# Altium PCB 19v_converter_pcb.PcbDoc
Units mil, origin at the board's own origin, x right, y up, seen from the top; angles counter-clockwise.
Board outline 6000 x 4000 mil, 2 copper layers (Top Layer, Bottom Layer); 35 components, 25 nets, 102 pads, 0 vias.
Unrouted connection lines stored in the file: 55.
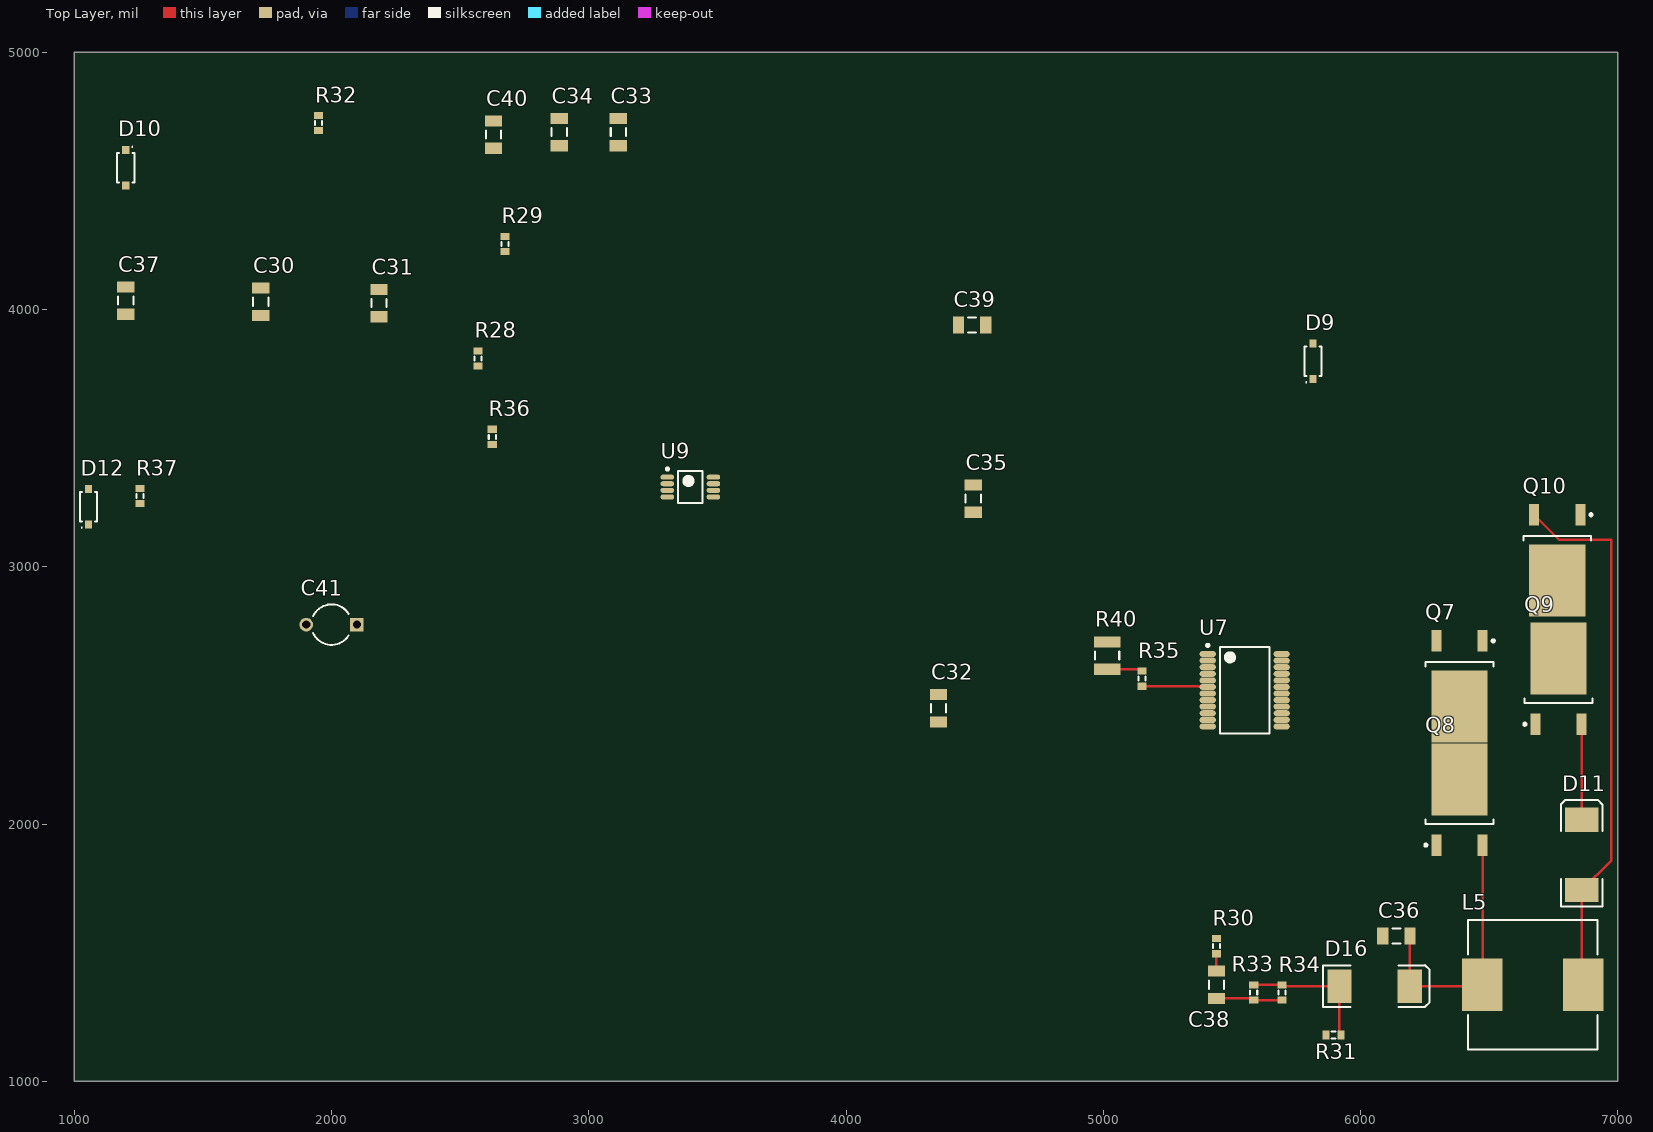
[diagram p0: Top Layer view]
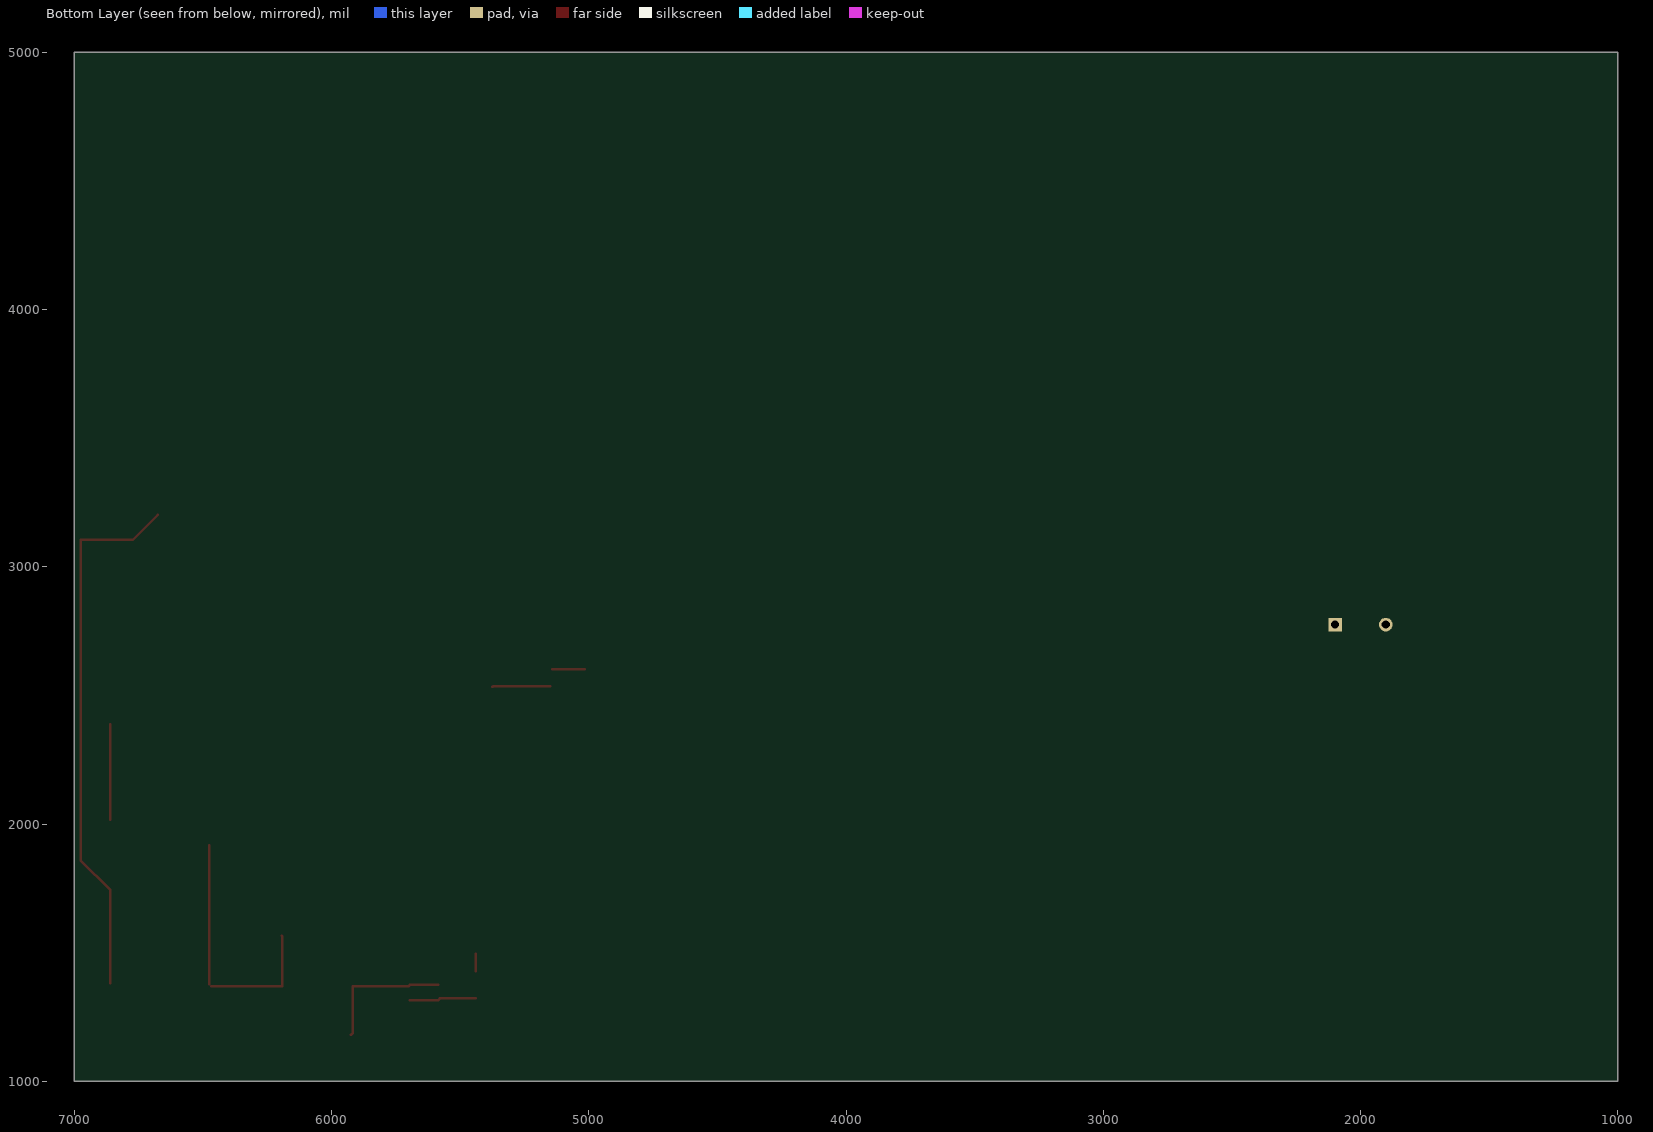
[diagram p1: Bottom Layer view, seen from below]

## Layer stack, top to bottom
Top Solder: solder mask 0.4, Solder Resist, Dk 3.5
Top Layer: signal copper 1.4
Dielectric 1: dielectric 12.6, FR-4, Dk 4.8
Bottom Layer: signal copper 1.4
Bottom Solder: solder mask 0.4, Solder Resist, Dk 3.5

## Board outline
1000,1000 7000,1000 7000,5000 1000,5000

## Design rules (kind name [scope] priority, off if disabled: settings)
Clearance [All] p1: gap=10
PolygonConnect [All] p1: connectstyle=Relief reliefconductorwidth=10 reliefentries=4 polygonreliefangle="90 Angle" airgapwidth=10
RoutingVias [All] p1: holewidth=28 width=50 viastyle="Through Hole" minholewidth=28 minwidth=50 maxholewidth=28 maxwidth=50
SolderMaskExpansion [All] p1: expansion=4
Width [All] p1: maxlimit=10 minlimit=10 preferedwidth=10
30 further rules are at their usual default settings.

## Components (designator, comment, footprint, x,y, rotation, side; value= is the part's Value field where it differs from the comment)
C30 "Cap Semi" C1206 1725,4030 r90 top
C31 "Cap Semi" C1206 2185,4025 r90 top
C32 "Cap Semi" C1206 4360,2450 r270 top
C33 "Cap Semi" C1206 3115,4690 r90 top
C34 "Cap Semi" C1206 2885,4690 r90 top
C35 "Cap Semi" C1206 4495,3265 r90 top
C36 "Cap Semi" C1206 6140,1565 r180 top
C37 "Cap Semi" C1206 1200,4035 r90 top
C38 "Cap Semi" C1206 5440,1375 r90 top
C39 "Cap Semi" C1206 4490,3940 r180 top
C40 "Cap Semi" C1206 2630,4680 r270 top
C41 "390u" CAPR5-4X5 2000,2775 r180 top
D9 "1N5819" SODFL370X175-2N 5815,4005 r90 top
D10 "1N5819" SODFL370X175-2N 1200,4345 r270 top
D11 "MBRS340" SMC 6860,1880 r90 top
D12 "MMSZ5230B" SODFL370X175-2N 1055,3440 r90 top
D16 "MBRS340" SMC 6055,1370 r0 top
L5 "SRR1240-4R7MCT" INDP125125X40N 6670,1375 r0 top
Q7 "BUK6212-40C" DPAK228P1000X238-3N 6385,2535 r270 top
Q8 "BUK6212-40C" DPAK228P1000X238-3N 6385,2095 r90 top
Q9 "BUK6212-40C" DPAK228P1000X238-3N 6770,2565 r90 top
Q10 "BUK6212-40C" DPAK228P1000X238-3N 6765,3025 r270 top
R28 "Res3" J1-0603 2570,3810 r90 top
R29 "Res3" J1-0603 2675,4255 r90 top
R30 "Res3" J1-0603 5440,1525 r90 top
R31 "Res3" J1-0603 5895,1180 r0 top
R32 "Res3" J1-0603 1950,4725 r90 top
R33 "Res3" J1-0603 5585,1345 r90 top
R34 "Res3" J1-0603 5695,1345 r90 top
R35 "Res3" J1-0603 5150,2565 r90 top
R36 "Res3" J1-0603 2625,3505 r90 top
R37 "Res3" J1-0603 1255,3275 r90 top
R40 "Res3" 14-1210 5015,2655 r90 top
U7 "LTC3780EG#PBF" SOP65P780X200-24N 5550,2520 r0 top
U9 "AD8217" TSOP65P490X110-8N 3395,3310 r0 top

## Footprints (in the part's own frame and the unit in brackets; to place one, negate y for a bottom-side part, rotate by r counter-clockwise, add the part's x,y. Pads: shape width x height; smd on the part's side, far side on the other; paste and mask are expansions set on the pad)
14-1210 [mm] "Chip Resistor, Body 3.2x2.5mm, IPC High Density"
  rect 1.1x2.6 smd: 1(-1.35,0) 2(1.35,0)
  silkscreen extent -0.4,-1.2 0.4,1.2, body extent -1.68,-1.32 1.68,1.32, height 0.9
C1206 [mm] "Chip Capacitor, Body 3.2x1.6mm, IPC High Density"
  rect 1.1x1.7 smd: 1(-1.35,0) 2(1.35,0)
  silkscreen extent -0.4,-0.75 0.4,0.75, body extent -1.7,-0.9 1.7,0.9, height 1.3
CAPR5-4X5 [mm] "Capacitor; 2 Leads"
  rect 1.35x1.35 hole 0.8: 1(-2.5,0)
  round 1.35 hole 0.8: 2(2.5,0)
  silkscreen extent -1.69,-2 1.82,2
DPAK228P1000X238-3N [mm] "D-PAK, 3-Pads, Body 6.21x6.73mm (max), IPC Medium Density"
  rect 2.1x1 smd: 1(-4.5,2.28) 3(-4.5,-2.28)
  rect 7.1x5.55 smd: 4(2,0)
  silkscreen extent -4.62,-3.35 -1.95,3.46, body extent -2.4,-3.37 3.82,3.37, height 2.38
INDP125125X40N [mm] "Precision Wire Wound Inductor, 2-Leads, Body 12.50x12.50mm, IPC Medium Density"
  rect 4x5.15 smd: 1(-5,0) 2(5,0)
  silkscreen extent -6.4,-6.4 6.4,6.4, body extent -6.4,-6.4 6.4,6.4, height 4.05
J1-0603 [mm] "Chip Resistor, Body 1.6x0.8mm, IPC High Density"
  rect 0.7x0.9 smd: 1(-0.75,0) 2(0.75,0)
  silkscreen extent -0.2,-0.35 0.2,0.35, body extent -0.85,-0.48 0.85,0.48, height 0.9
SMC [mm] "DO-214-AB/SMC; 2 C-Bend Leads; Body 7.9 x 5.9 mm, inc. leads (LxW)"
  rect 2.4x3.3 smd: 1(-3.475,0) 2(3.475,0)
  silkscreen extent -5.07,-2.05 5.43,2.05
SODFL370X175-2N [mm] "SODFL, 2-Leads, Body 1.55x3.70mm, IPC Medium Density"
  rect 0.8x0.7 smd: 1(-7,0) 2(-3.5,0)
  silkscreen extent -7.35,-0.85 -3.8,0.85, body extent -6.67,-0.85 -3.82,0.85, height 1.75
SOP65P780X200-24N [mm] "SOP, 24-Leads, Body 8.20x5.50mm, Pitch 0.65mm, IPC Medium Density"
  oval 1.6x0.6 smd: 1(-3.65,3.575) 2(-3.65,2.925) 3(-3.65,2.275) 4(-3.65,1.625) 5(-3.65,0.975) 6(-3.65,0.325) 7(-3.65,-0.325) 8(-3.65,-0.975) 9(-3.65,-1.625) 10(-3.65,-2.275) 11(-3.65,-2.925) 12(-3.65,-3.575) 13(3.65,-3.575) 14(3.65,-2.925) 15(3.65,-2.275) 16(3.65,-1.625) 17(3.65,-0.975) 18(3.65,-0.325) 19(3.65,0.325) 20(3.65,0.975) 21(3.65,1.625) 22(3.65,2.275) 23(3.65,2.925) 24(3.65,3.575)
  silkscreen extent -3.77,-4.25 2.45,4.55, body extent -2.85,-4.25 2.85,4.25, height 2
TSOP65P490X110-8N [mm] "TSOP, 8-Leads, Body 3.00x3.00mm, Pitch 0.65mm, IPC Medium Density"
  oval 1.35x0.5 smd: 1(-2.275,0.975) 2(-2.275,0.325) 3(-2.275,-0.325) 4(-2.275,-0.975) 5(2.275,-0.975) 6(2.275,-0.325) 7(2.275,0.325) 8(2.275,0.975)
  silkscreen extent -2.4,-1.6 1.2,1.9, body extent -1.6,-1.6 1.6,1.6, height 1.1

## Part data
C30 C31 C32 C33 C34 C35 C36 C37 C38 C39 C40: "Capacitor (Semiconductor SIM Model)"
C41: library part Alum_Cap
D9 D10 D12 Q7 Q8 Q9 Q10: library part Component_1
D11 D16: library part Diode, "Default Diode"
R28 R29 R30 R31 R32 R33 R34 R35 R36 R37 R40: "Resistor"
U7: "Buck-boost Controller, Constant Frequency, Current Mode Control with Power Good Output, 24-pin SOP (G-24), -40 to 85 degC, Pb-Free"
U9: library part Component_1, "Current Shunt Moniter"

## Nets (pads, with @x,y where several pads share a name; then routed paths per layer and width w, separated by ;. In a path a pad name is that pad's centre, name@x,y a point inside that pad or via, vN(x,y) a via of type N, cw(c..) or ccw(c..) an arc to the next point about the centre after c; other vN are vias at no path point)
BG1: Q10.1 U7.18
BG2: Q8.1 U7.16
DQ9: C40.2 C41.1 D11.2 Q9.3 R35.2 R40.1 U9.1 | length 498.8
  Top Layer w10: R40.1 R35.2@5142.68,2601.85 ; Q9.3 6859.76,2017.05 D11.2
DQ10: C37.1 D11.1 L5.2 Q10.3 U7.22 | length 2110.8
  Top Layer w10: Q10.3 6772.4,3105 6975,3105 6975,1858.19 D11.1 L5.2@6860,1381.85
GND: C30.1 C31.1 C32.1 C33.1 C34.1 C35.1 C38.1 C40.1 C41.2 D12.1 R32.2 R33.1 R34.1 R37.1 U7.7 U7.9 U7.10 U7.11 U7.17 U7.20 U9.4 | length 257.6
  Top Layer w10: C38.1 5578.62,1321.85 R33.1 R34.1
NetC30_2: C30.2 C31.2 Q7.3 R28.2 U7.21
NetC32_2: C32.2 U7.12
NetC33_2: C33.2 R29.2 U7.5
NetC34_2: C34.2 R29.1
NetC35_2: C35.2 U7.2
NetC36_1: C36.1 D16.2 L5.1 Q8.3 U7.15 | length 1013.1
  Top Layer w10: C36.1 6191.81,1563.66 D16.2 L5.1@6468.15,1370 ; L5.1@6474.76,1376.61 Q8.3
NetC36_2: C36.2 D9.2 U7.13
NetC37_2: C37.2 D10.2 U7.24
NetC38_2: C38.2 D9.1 D10.1 R30.1 U7.19 | length 67.3
  Top Layer w10: C38.2 R30.1
NetC39_1: C39.1 R32.1 U7.4
NetC39_2: C39.2 R31.1 U7.3
NetD16_1: D16.1 R31.2 R33.2 R34.2 | length 527.7
  Top Layer w10: R33.2 R34.2 5699.53,1370 D16.1 5918.19,1186.34 R31.2
NetR30_2: R30.2 U7.1
NetR35_1: R35.1 R36.2 U7.6 | length 225.4
  Top Layer w10: R35.1 5371.61,2535.47 5374.29,2532.8
NetR36_1: R36.1 R37.2
NetR40_2: R40.2 U9.8
NetU9_5: U9.5
RUN: D12.2 R28.1 U7.8
TG1: Q9.1 U7.23
TG2: Q7.1 U7.14
pads on no net: Q7.4 Q8.4 Q9.4 Q10.4 U9.2 U9.3 U9.6 U9.7